# Allegro board multiuart_power1_V1.0.brd
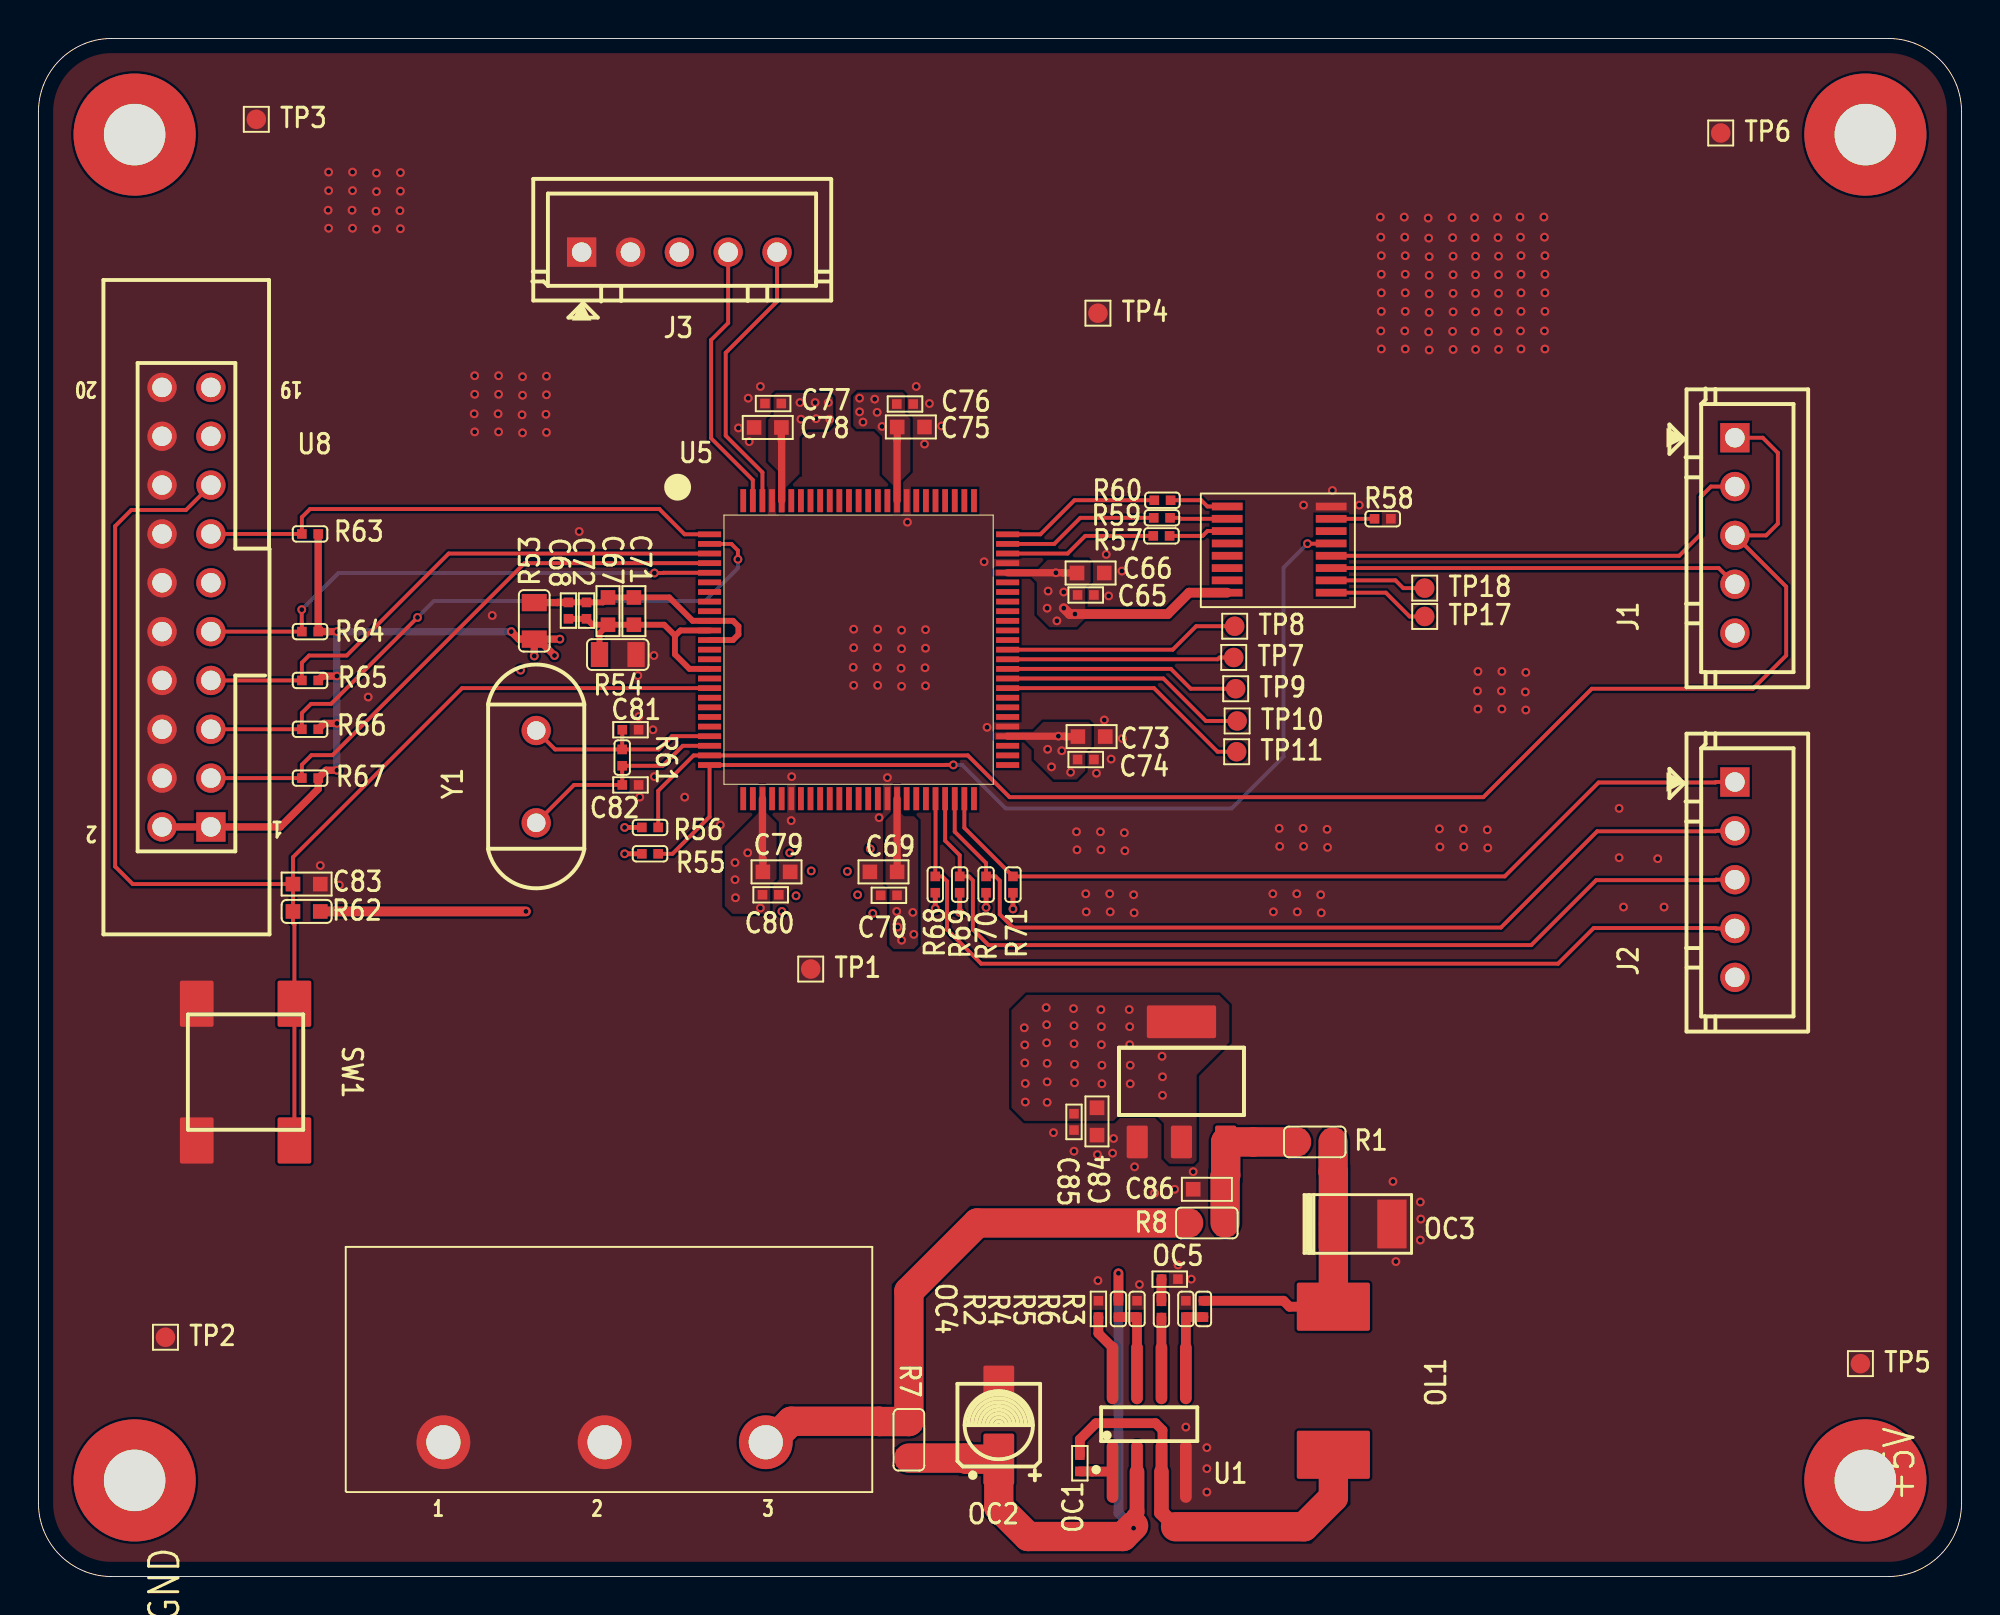
[diagram p0: board, top side]
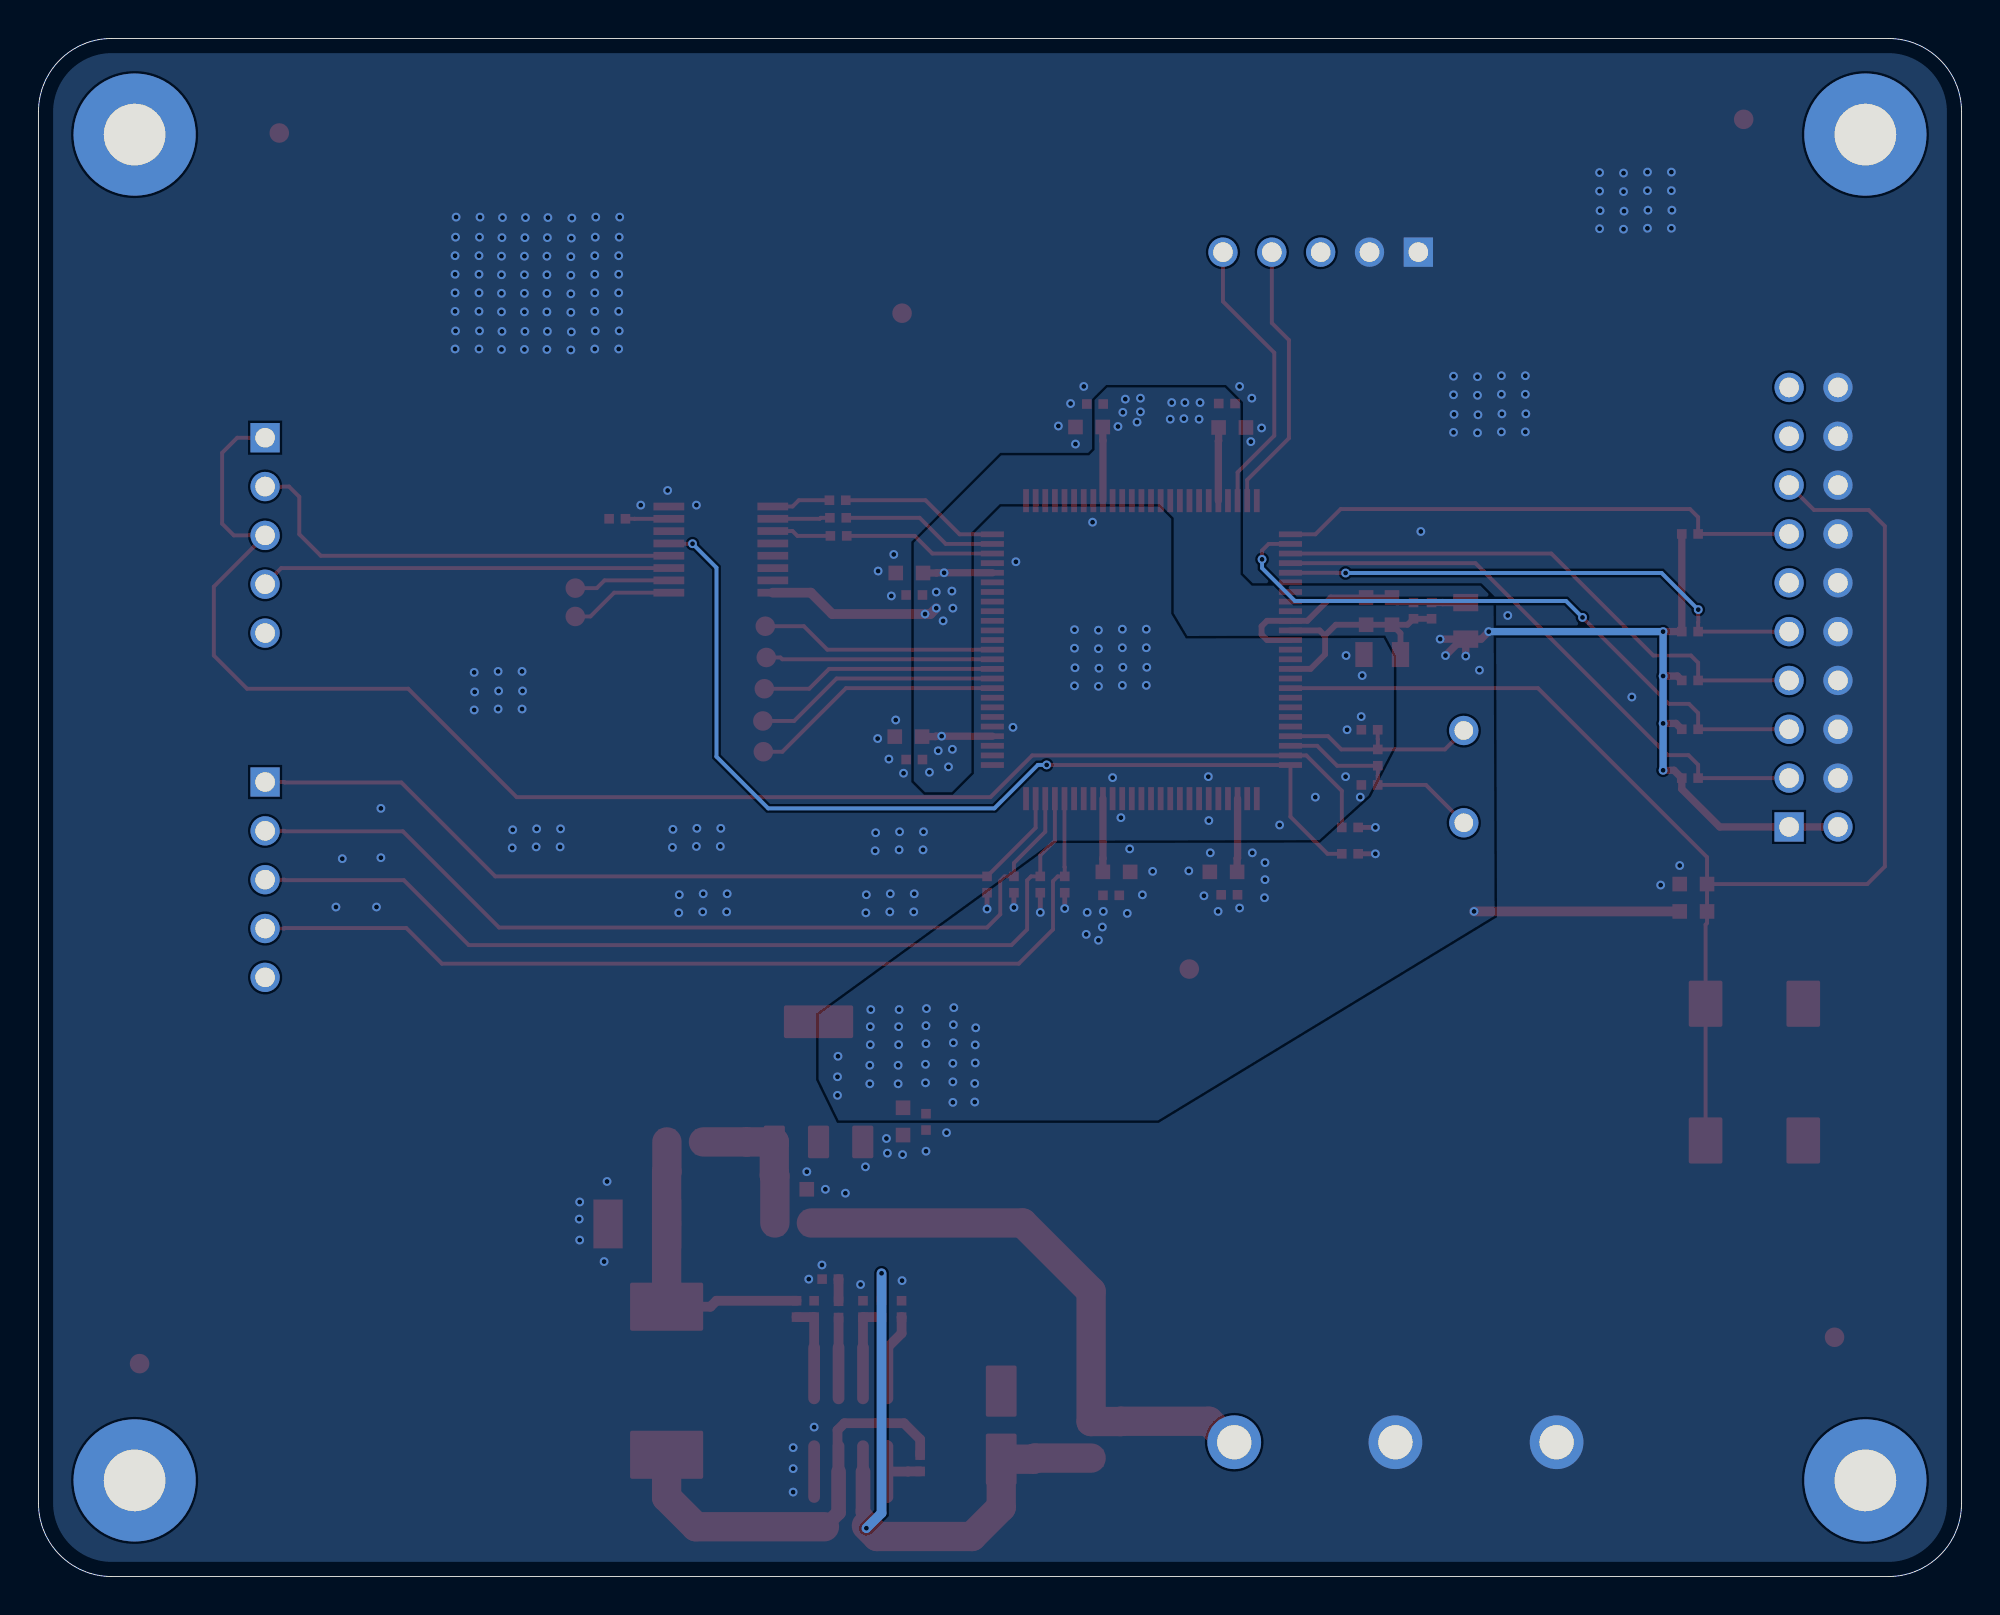
[diagram p1: board, bottom side, seen from below]

Outline 100 x 80 mm; copper layers: TOP, BOTTOM. Coordinates in mm from the lower left corner of the outline.
Outline path: 0,76.19 arc(1.12,78.88) 3.81,80 96.19,80 arc(98.88,78.88) 100,76.19 100,3.81 arc(98.88,1.12) 96.19,0 3.81,0 arc(1.12,1.12) 0,3.81 0,76.19

## Placement (name value [footprint] x y rotation side)
C65  10uF  [C0603]  54.71 52.2 180 top
C66  104  [C0402]  54.46 51.05 0 top
C67  10uF  [C0603]  29.62 50.22 90 top
C68  104  [C0402]  27.56 50.24 270 top
C69  10uF  [C0603]  43.94 36.65 0 top
C70  104  [C0402]  44.22 35.43 180 top
C71  10uF  [C0603]  30.96 50.22 90 top
C72  104  [C0402]  28.5 50.24 270 top
C73  10uF  [C0603]  54.76 43.69 180 top
C74  104  [C0402]  54.46 42.49 0 top
C75  10uF  [C0603]  45.36 59.79 180 top
C76  104  [C0402]  45.06 60.99 0 top
C77  10uF  [C0603]  37.92 59.77 0 top
C78  104  [C0402]  38.2 61.01 180 top
C79  10uF  [C0603]  38.38 36.65 180 top
C80  104  [C0402]  38.07 35.46 0 top
C81  20pF  [C0402]  30.78 44.04 0 top
C82  20pF  [C0402]  30.78 41.17 0 top
C83  102  [C0603]  13.94 36.02 0 top
C84  10uF  [C0603]  55.04 23.67 90 top
C85  104  [C0402]  53.85 23.65 270 top
C86  10uF  [C0603]  60.76 20.14 0 top
J1  -  [CON5]  88.21 49.07 90 top
J2  -  [CON5]  88.21 31.17 90 top
J3  -  [CON5]  38.4 68.88 180 top
NOREF  -  [unnamed]  95 75 0 top
NOREF#2  -  [unnamed]  5 5 0 top
NOREF#3  -  [unnamed]  5 75 0 top
NOREF#4  -  [unnamed]  95 5 0 top
OC1  10nF  [C0402]  54.15 5.89 90 top
OC2  22uF-25V  [CAPAE430X600]  49.94 7.87 90 top
OC3  22uF-16V  [CT1210]  68.86 18.34 0 top
OC4  104  [C0402]  55.12 13.92 90 top
OC5  332  [C0402]  58.83 15.47 0 top
OL1  22uH-DCR<0.1R-2A  [INDP8X8]  67.34 10.19 90 top
R1  0R  [R0805]  66.37 22.61 180 top
R2  1M  [R0402]  56.16 13.92 270 top
R3  47K  [R0402]  60.58 13.92 90 top
R4  1M  [R0402]  57.12 13.92 270 top
R5  2K2  [R0402]  58.39 13.89 270 top
R6  10K  [R0402]  59.66 13.92 270 top
R7  0R  [R0805]  45.26 7.11 270 top
R8  0R/NC  [R0805]  60.76 18.39 0 top
R53  0R  [R0805]  25.78 49.71 90 top
R54  0R  [R0805]  30.12 47.96 180 top
R55  10K  [R0402]  31.8 37.59 0 top
R56  10K  [R0402]  31.8 38.96 0 top
R57  0R  [R0402]  58.39 54.13 180 top
R58  0R  [R0402]  69.9 55.02 180 top
R59  0R  [R0402]  58.42 55.07 180 top
R60  0R  [R0402]  58.45 55.98 180 top
R61  10M  [R0402]  30.35 42.6 270 top
R62  10K  [R0603]  13.94 34.59 180 top
R63  10K  [R0402]  14.12 54.23 0 top
R64  10K  [R0402]  14.12 49.15 0 top
R65  10K  [R0402]  14.12 46.61 0 top
R66  10K  [R0402]  14.12 44.07 0 top
R67  10K  [R0402]  14.12 41.53 0 top
R68  10K  [R0402]  46.63 35.99 90 top
R69  10K  [R0402]  47.9 35.99 90 top
R70  10K  [R0402]  49.28 35.99 90 top
R71  10K  [R0402]  50.67 35.99 90 top
SW1  SW_PUSH2  [SW4_SMD]  10.77 26.24 270 top
TP1  P2.1  [TP_SMD]  40.16 31.6 0 top
TP2  P2.2  [TP_SMD]  6.6 12.45 0 top
TP3  P2.4  [TP_SMD]  11.33 75.79 0 top
TP4  P1.4  [TP_SMD]  55.09 65.71 0 top
TP5  P1.17  [TP_SMD]  94.74 11.07 0 top
TP6  P1.19  [TP_SMD]  87.48 75.08 0 top
TP7  P0.23  [TP_SMD]  62.15 47.8 0 top
TP8  P0.24  [TP_SMD]  62.2 49.43 0 top
TP9  P0.25  [TP_SMD]  62.26 46.18 0 top
TP10  P0.26  [TP_SMD]  62.33 44.5 0 top
TP11  P1.27  [TP_SMD]  62.31 42.9 0 top
TP17  P1.0  [TP_SMD]  72.09 49.94 0 top
TP18  P1.0  [TP_SMD]  72.09 51.41 0 top
U1  MP1482DS  [SO8N]  57.76 7.92 0 top
U5  LPC1768  [LQFP100P0_5B14X14]  42.65 48.21 270 top
U6  SN74CB3Q3251DBQR  [SN74CB3Q3251_DBQ]  64.26 53.87 90 top
U7  AMS1117-3.3V  [SOT223]  59.44 25.76 0 top
U8  CONN20X2_54  [IDC-20]  7.7 50.42 180 top
UP1  CON3  [CON3-P]  29.41 11.33 0 top
Y1  12M  [XDIP2]  25.88 41.61 90 top

## Library data of the parts
C65-C86 OC1 OC4 OC5 = CAPACITOR
J1-J3 = CON5
OC2 = CAPACITOR_POL_0: Tolerance: RichardLC
OC3 = CAPACITOR_POL_0
OL1 = INDUCTOR_1: Tolerance: RichardLC
R1 R7 R8 = R-R0805
R2-R6 R53-R60 R68-R71 = R
R61-R67 = RESISTOR
SW1 = SW_PUSH2
TP1-TP11 TP17 TP18 = T_POINT_R
U1 = PM1066: User Part Number: pn; Tolerance: RichardLC
U5 = LPC1768_0
U6 = SN74CB3Q3251DBQR_5
U7 = AMS1117: User Part Number: pn; Tolerance: RichardLC
U8 = CON 10x2 2.0mm
UP1 = CON3: room: CPU
Y1 = CRY_1

## Footprints (pads in the part's own frame, mm; a bottom-side part is the same pattern mirrored in y, then rotated)
C0402
  rect 0.5x0.5 smd: 1(0.425,0) 2(-0.425,0)
C0603
  rect 0.76x0.76 smd: 1(-0.71,0) 2(0.71,0)
CAPAE430X600
  custom 2.66x1.6 smd: 1(-1.77,0) 2(1.77,0)
CON3-P
  round 2.794 hole 1.778: 1(-8.357,-4.343) 2(0.025,-4.343) 3(8.407,-4.343)
CON5
  rect 1.524x1.524 hole 1.016: 1(10.16,0)
  round 1.524 hole 1.016: 2(7.62,0) 3(5.08,0) 4(2.54,0) 5(0,0)
CT1210
  rect 1.524x2.54 smd: 1(-1.524,0) 2(1.524,0)
IDC-20
  rect 1.524x1.524 hole 1.016: 1(-1.27,11.43)
  round 1.524 hole 1.016: 2(1.27,11.43) 3(-1.27,8.89) 4(1.27,8.89) 5(-1.27,6.35) 6(1.27,6.35) 7(-1.27,3.81) 8(1.27,3.81) 9(-1.27,1.27) 10(1.27,1.27) 11(-1.27,-1.27) 12(1.27,-1.27) 13(-1.27,-3.81) 14(1.27,-3.81) 15(-1.27,-6.35) 16(1.27,-6.35) 17(-1.27,-8.89) 18(1.27,-8.89) 19(-1.27,-11.43) 20(1.27,-11.43)
INDP8X8
  custom 2.5x3.8 smd: 1(-3.85,0) 2(3.85,0)
LQFP100P0_5B14X14
  rect 0.3x1.2 smd: 1(-6,-7.75) 2(-5.5,-7.75) 3(-5,-7.75) 4(-4.5,-7.75) 5(-4,-7.75) 6(-3.5,-7.75) 7(-3,-7.75) 8(-2.5,-7.75) 9(-2,-7.75) 10(-1.5,-7.75) 11(-1,-7.75) 12(-0.5,-7.75) 13(0,-7.75) 14(0.5,-7.75) 15(1,-7.75) 16(1.5,-7.75) 17(2,-7.75) 18(2.5,-7.75) 19(3,-7.75) 20(3.5,-7.75) 21(4,-7.75) 22(4.5,-7.75) 23(5,-7.75) 24(5.5,-7.75) 25(6,-7.75) 51(6,7.75) 52(5.5,7.75) 53(5,7.75) 54(4.5,7.75) 55(4,7.75) 56(3.5,7.75) 57(3,7.75) 58(2.5,7.75) 59(2,7.75) 60(1.5,7.75) 61(1,7.75) 62(0.5,7.75) 63(0,7.75) 64(-0.5,7.75) 65(-1,7.75) 66(-1.5,7.75) 67(-2,7.75) 68(-2.5,7.75) 69(-3,7.75) 70(-3.5,7.75) 71(-4,7.75) 72(-4.5,7.75) 73(-5,7.75) 74(-5.5,7.75) 75(-6,7.75)
  rect 1.2x0.3 smd: 26(7.75,-6) 27(7.75,-5.5) 28(7.75,-5) 29(7.75,-4.5) 30(7.75,-4) 31(7.75,-3.5) 32(7.75,-3) 33(7.75,-2.5) 34(7.75,-2) 35(7.75,-1.5) 36(7.75,-1) 37(7.75,-0.5) 38(7.75,0) 39(7.75,0.5) 40(7.75,1) 41(7.75,1.5) 42(7.75,2) 43(7.75,2.5) 44(7.75,3) 45(7.75,3.5) 46(7.75,4) 47(7.75,4.5) 48(7.75,5) 49(7.75,5.5) 50(7.75,6) 76(-7.75,6) 77(-7.75,5.5) 78(-7.75,5) 79(-7.75,4.5) 80(-7.75,4) 81(-7.75,3.5) 82(-7.75,3) 83(-7.75,2.5) 84(-7.75,2) 85(-7.75,1.5) 86(-7.75,1) 87(-7.75,0.5) 88(-7.75,0) 89(-7.75,-0.5) 90(-7.75,-1) 91(-7.75,-1.5) 92(-7.75,-2) 93(-7.75,-2.5) 94(-7.75,-3) 95(-7.75,-3.5) 96(-7.75,-4) 97(-7.75,-4.5) 98(-7.75,-5) 99(-7.75,-5.5) 100(-7.75,-6)
R0402
  rect 0.5x0.5 smd: 1(0.425,0) 2(-0.425,0)
R0603
  rect 0.76x0.76 smd: 1(-0.71,0) 2(0.71,0)
R0805
  rect 0.9x1.3 smd: 1(-0.95,0) 2(0.95,0)
SN74CB3Q3251_DBQ
  rect 0.401x1.6 smd: 1(-2.7,-2.959) 2(-2.06,-2.959) 3(-1.42,-2.959) 4(-0.78,-2.959) 5(-0.14,-2.959) 6(0.5,-2.959) 7(1.141,-2.959) 8(1.78,-2.959) 9(1.783,2.446) 10(1.143,2.449) 11(0.506,2.446) 12(-0.14,2.446) 13(-0.78,2.449) 14(-1.422,2.449) 15(-2.06,2.449) 16(-2.7,2.449)
SO8N
  oval 0.61x3.251 smd: 1(-1.905,-2.465) 2(-0.635,-2.465) 3(0.635,-2.465) 4(1.905,-2.465) 5(1.905,2.665) 6(0.635,2.665) 7(-0.635,2.665) 8(-1.905,2.665)
SOT223
  custom 1.1x1.7 smd: 1(-2.3,-3.15) 2(0,-3.15) 3(2.3,-3.15)
  custom 3.6x1.7 smd: 4(0,3.1)
SW4_SMD
  custom 2.4x1.75 smd: 1(3.556,2.54) 2(-3.556,2.54) 3(-3.556,-2.54) 4(3.556,-2.54)
TP_SMD
  round 1.016 smd: 1(0,0)
unnamed
  round 6.35 hole 3.2: (0,0)
XDIP2
  round 1.524 hole 0.965: 1(-2.4,0) 2(2.4,0)

## Nets
GND: C65.1 C66.1 C69.1 C70.1 C73.1 C74.1 C75.1 C76.1 C77.1 C78.1 C79.1 C80.1 C81.1 C82.1 C83.2 C84.1 C85.1 C86.1 J3.1 J3.2 OC2.2 OC3.2 OC4.1 OC5.1 R4.2 R6.2 R54.1 R58.2 SW1.3 SW1.4(6) TP1.1(TP) TP2.1(TP) TP3.1(TP) TP4.1(TP) TP5.1(TP) TP6.1(TP) U1.4(GND) U5.31(VSS1) U5.41(VSS2) U5.55(VSS3) U5.72(VSS4) U5.83(VSS5) U5.97(VSS6) U6.8(GND) U7.1(ADJUST) U8.4 U8.6 U8.8 U8.10 U8.12 U8.14 U8.16 U8.18 U8.20 UP1.1 UP1.2
VCC_3V3: C65.2 C66.2 C69.2 C70.2 C73.2 C74.2 C75.2 C76.2 C77.2 C78.2 C79.2 C80.2 C84.2 C85.2 R53.1 R55.2 R56.2 R62.1 R63.1 R64.1 R65.1 R66.1 R67.1 R68.2 R69.2 R70.2 R71.2 U5.28(VDD1) U5.42(VDDREG1) U5.54(VDD2) U5.71(VDD3) U5.84(VDDREG2) U5.96(VDD4) U6.16(VCC) U7.2(OUT) U7.4(NC) U8.1 U8.2
VCC_5V: C86.2 R1.2 R8.2 U7.3(IN)
VCCIN: R7.1 R8.1 UP1.3
VDDA: C67.2 C68.2 C71.2 C72.2 R53.2 U5.10(VDDA) U5.12(VREFP)
#RESET: C83.1 R62.2 SW1.1 SW1.2 U5.17(#RESET) U8.15
#TRST: R67.2 U5.4(#TRST) U8.3
ACIN-12V: OC2.1 R2.2 R7.2 U1.2(IN)
I2C0-SCK: J1.1 J1.3 R56.1 U5.24(P0.28)
I2C0-SDA: R55.1 U5.25(P0.27) U6.5(A)
I2C0-SDA0: J1.2 U6.4(B1)
I2C0-SDA1: J1.4 U6.3(B2)
I2C1-SCK: J2.3 R69.1 U5.47(P0.1)
I2C1-SDA: J2.4 R68.1 U5.46(P0.0)
I2C2-SCK: J2.1 R71.1 U5.49(P0.11)
I2C2-SDA: J2.2 R70.1 U5.48(P0.10)
P0.2: J3.5 U5.98(P0.2)
P0.3: J3.4 U5.99(P0.3)
P0.4: U5.81(P0.4)
P0.5: U5.80(P0.5)
P0.6: U5.79(P0.6)
P0.7: U5.78(P0.7)
P0.8: U5.77(P0.8)
P0.9: U5.76(P0.9)
P0.15: TP7.1(TP) U5.62(P0.15)
P0.16: TP8.1(TP) U5.63(P0.16)
P0.17: TP9.1(TP) U5.61(P0.17)
P0.18: TP10.1(TP) U5.60(P0.18)
P0.19: TP11.1(TP) U5.59(P0.19)
P0.20: U5.58(P0.20)
P0.21: U5.57(P0.21)
P0.22: U5.56(P0.22)
P0.23: U5.9(P0.23)
P0.24: U5.8(P0.24)
P0.25: U5.7(P0.25)
P0.26: U5.6(P0.26)
P0.29: U5.29(P0.29)
P0.30: U5.30(P0.30)
P1.0: U5.95(P1.0)
P1.1: U5.94(P1.1)
P1.4: U5.93(P1.4)
P1.8: U5.92(P1.8)
P1.9: U5.91(P1.9)
P1.10: U5.90(P1.10)
P1.14: U5.89(P1.14)
P1.15: U5.88(P1.15)
P1.16: U5.87(P1.16)
P1.17: U5.86(P1.17)
P1.18: U5.32(P1.18)
P1.19: U5.33(P1.19)
P1.20: U5.34(P1.20)
P1.21: U5.35(P1.21)
P1.22: U5.36(P1.22)
P1.23: U5.37(P1.23)
P1.24: U5.38(P1.24)
P1.25: U5.39(P1.25)
P1.26: U5.40(P1.26)
P1.27: U5.43(P1.27)
P1.28: U5.44(P1.28)
P1.29: U5.45(P1.29)
P1.30: U5.21(P1.30)
P1.31: U5.20(P1.31)
P2.0: R60.1 U5.75(P2.0)
P2.1: R59.1 U5.74(P2.1)
P2.2: R57.1 U5.73(P2.2)
P2.3: U5.70(P2.3)
P2.4: U5.69(P2.4)
P2.5: U5.68(P2.5)
P2.6: U5.67(P2.6)
P2.7: U5.66(P2.7)
P2.8: U5.65(P2.8)
P2.9: U5.64(P2.9)
P2.10: U5.53(P2.10)
P2.11: U5.52(P2.11)
P2.12: U5.51(P2.12)
P2.13: U5.50(P2.13)
P3.25: U5.27(P3.25)
P3.26: U5.26(P3.26)
P4.28: U5.82(P4.28)
P4.29: U5.85(P4.29)
TCK/SWDCLK: R64.2 U5.5(TCK/SWDCLK) U8.9
TDI: R66.2 U5.2(TDI) U8.5
TDO/SWO: R63.2 U5.1(TDO/SWO) U8.13
TMS/SWDIO: R65.2 U5.3(TMS/SWDIO) U8.7
VREFN: C67.1 C68.1 C71.1 C72.1 R54.2 U5.11(VSSA) U5.15(VREFN)
XTAL1: C81.2 R61.2 U5.22(XTAL1) Y1.2
XTAL2: C82.2 R61.1 U5.23(XTAL2) Y1.1
N16722546: R58.1 U6.7(O\E\)
N16722572: R59.2 U6.10(S1)
N16722576: R57.2 U6.11(S0)
N16722580: R60.2 U6.9(S2)
N16725414: TP17.1(TP) U6.1(B4)
N16725434: TP18.1(TP) U6.2(B3)
N16752573: OC3.1 OL1.2 R1.1 R3.1
N16752577: OC1.1 OL1.1 U1.3(SW)
N16752843: OC4.2 U1.8(SS)
N16752877: R2.1 R4.1 U1.7(EN)
N16752929: R3.2 R6.1 U1.5(FB)
N16752937: OC1.2 U1.1(BST)
N167526111: OC5.2 R5.2
N167526413: R5.1 U1.6(COMP)

Pads without a net: J1 5; J2 5; J3 3; U5 13 14 16 18 19 100; U6 6 12 13 14 15; U8 11 17 19

## Via types
v1: diameter 0.457, hole 0.254, TOP to BOTTOM, 311 vias

## Routing (per net, layer and track width the routed paths; a pad name or vN(x,y) marks a point on that pad's centre or on a via; arc(x,y) is an arc through that point)
GND:
  vias: v1(14.66,36.98) v1(15.09,73.05) v1(15.09,72.08) v1(15.06,71.07) v1(15.09,70.13) v1(15.65,35.97) v1(16.33,73.05) v1(16.33,72.08) v1(16.31,71.07) v1(16.33,70.13) v1(17.14,45.75) v1(17.58,73) v1(17.58,72.03) v1(17.55,71.02) v1(17.58,70.08) v1(18.82,73.02) v1(18.82,72.06) v1(18.8,71.04) v1(18.82,70.1) v1(22.68,62.46) v1(22.68,61.49) v1(22.66,60.48) v1(22.68,59.54) v1(23.6,49.99) v1(23.93,62.46) v1(23.93,61.49) v1(23.9,60.48) v1(23.93,59.54) v1(25.15,60.43) v1(25.17,62.41) v1(25.17,61.44) v1(25.17,59.49) v1(26.42,62.43) v1(26.42,61.47) v1(26.39,60.45) v1(26.42,59.51) v1(28.12,54.36) v1(31.17,46.86) v1(31.22,44.73) v1(31.27,40.54) v1(32,47.9) v1(31.95,44.04) v1(32.03,41.61) v1(33.6,40.54) v1(35.46,39.09) v1(36.4,59.74) v1(36.91,61.29) v1(36.96,59.03) v1(37.54,61.9) v1(39.14,39.32) v1(39.17,41.61) v1(42.39,49.27) v1(42.39,48.31) v1(42.37,47.29) v1(42.39,46.35) v1(43.64,49.27) v1(43.64,48.31) v1(43.61,47.29) v1(43.64,46.35) v1(43.71,39.47) v1(44.15,41.55) v1(44.88,49.22) v1(44.88,48.26) v1(44.86,47.24) v1(44.88,46.3) v1(45.19,54.84) v1(45.64,61.9) v1(46.08,58.9) v1(46.13,49.25) v1(46.13,48.28) v1(46.1,47.27) v1(46.13,46.33) v1(46.33,61.01) v1(46.96,59.84) v1(49.17,52.78) v1(49.33,44.17) v1(52.78,23.09) v1(53.85,22.12) v1(53.98,38.74) v1(54,37.8) v1(54.46,35.51) v1(54.49,34.57) v1(55.02,41.78) v1(55.07,21.95) v1(55.09,15.39) v1(55.22,38.74) v1(55.25,37.8) v1(55.42,44.55) v1(55.52,53.16) v1(55.65,51) v1(55.7,35.51) v1(55.73,34.57) v1(55.78,42.52) v1(55.91,22.78) v1(55.85,22.02) v1(56.34,52.3) v1(56.36,43.59) v1(56.47,38.69) v1(56.49,37.75) v1(56.95,35.46) v1(56.97,34.52) v1(57,21.31) v1(57.25,15.19) v1(58.04,19.94) v1(59.08,20.14) v1(59.26,16.21) v1(59.66,7.77) v1(59.94,15.47) v1(60.05,21.06) v1(60.76,6.71) v1(60.76,5.61) v1(60.76,4.39) v1(64.19,35.51) v1(64.21,34.57) v1(64.52,38.92) v1(64.54,37.98) v1(65.43,35.51) v1(65.46,34.57) v1(65.79,55.73) v1(65.76,38.92) v1(65.79,37.98) v1(66.68,35.46) v1(66.7,34.52) v1(67.01,38.87) v1(67.03,37.93) v1(67.28,56.49) v1(68.68,55.73) v1(69.78,70.71) v1(69.8,69.67) v1(69.83,68.7) v1(69.83,67.73) v1(69.83,66.77) v1(69.83,65.8) v1(69.8,64.79) v1(69.83,63.85) v1(70.43,20.55) v1(70.59,16.38) v1(71.02,70.71) v1(71.05,69.67) v1(71.05,64.79) v1(71.07,68.7) v1(71.07,67.73) v1(71.07,66.77) v1(71.07,65.8) v1(71.07,63.85) v1(71.86,19.48) v1(71.88,18.59) v1(71.86,17.5) v1(72.26,70.66) v1(72.29,69.61) v1(72.32,68.65) v1(72.32,67.68) v1(72.32,66.72) v1(72.32,65.75) v1(72.29,64.74) v1(72.32,63.8) v1(72.85,38.89) v1(72.88,37.95) v1(73.51,70.68) v1(73.54,69.64) v1(73.54,64.76) v1(73.56,68.67) v1(73.56,67.71) v1(73.56,66.74) v1(73.56,65.78) v1(73.56,63.82) v1(74.09,38.89) v1(74.12,37.95) v1(74.68,70.68) v1(74.7,69.64) v1(74.73,68.67) v1(74.73,67.71) v1(74.73,66.74) v1(74.73,65.78) v1(74.7,64.76) v1(74.73,63.82) v1(74.83,46.06) v1(74.85,47.08) v1(74.85,45.12) v1(75.34,38.84) v1(75.36,37.9) v1(75.87,70.68) v1(75.9,69.64) v1(75.92,68.67) v1(75.92,67.71) v1(75.92,66.74) v1(75.92,65.78) v1(75.9,64.76) v1(75.92,63.82) v1(76.1,47.08) v1(76.07,46.06) v1(76.1,45.12) v1(77.04,70.71) v1(77.07,69.67) v1(77.09,68.7) v1(77.09,67.73) v1(77.09,66.77) v1(77.09,65.8) v1(77.07,64.79) v1(77.09,63.85) v1(77.34,47.03) v1(77.32,46.01) v1(77.34,45.07) v1(78.28,70.71) v1(78.31,69.67) v1(78.34,68.7) v1(78.34,67.73) v1(78.34,66.77) v1(78.34,65.8) v1(78.31,64.79) v1(78.34,63.85) v1(82.19,39.95) v1(82.19,37.39) v1(82.42,34.82) v1(84.2,37.34) v1(84.53,34.82)
VCC_3V3: length 87.5
  TOP w0.254: R71.2 v1(50.67,34.72) ; R69.2 v1(47.9,34.54) ; R68.2 v1(46.63,34.75) ; R55.2 v1(30.48,37.59) ; R70.2 v1(49.28,34.8) ; R56.2 v1(30.48,38.96)
  TOP w0.381: U5.71 v1(52.91,52.21) 53.29,52.21 53.3,52.2 C65.2 ; v1(15.52,46.84) 14.78,46.84 R65.1 ; v1(15.52,49.15) R64.1 R63.1 ; R53.1 v1(25.78,47.88) ; R53.1 24.98,48.76 v1(24.59,49.15) ; R53.1 25.98,48.76 ; U5.28 37.65,37.37 37.67,37.35 C79.2 ; v1(15.52,44.37) 14.85,44.37 R66.1 ; 25.98,48.76 v1(27.11,48.76) ; 25.98,48.76 v1(26.83,47.9) ; C73.2 53.35,43.69 53.33,43.71 v1(53.04,43.71) U5.54 ; v1(15.52,41.94) 14.95,41.94 R67.1 14.55,40.96 12.57,38.99 U8.1 U8.2 ; U5.42 44.65,37.36 44.65,37.35 C69.2 ; U5.96 38.65,59.05 38.63,59.07 C77.2 ; C75.2 44.65,59.09 44.65,59.09 U5.84
  TOP w0.508: R62.1 v1(25.35,34.59) ; v1(53.31,50.37) 53.62,50.06 v1(53.9,50.06) 58.72,50.06 59.83,51.17 U6.16
  BOTTOM w0.381: v1(15.52,41.94) v1(15.52,44.37) v1(15.52,46.84) v1(15.52,49.15) v1(24.59,49.15)
  vias: v1(25.07,47.14) v1(36.22,37.13) v1(36.22,36.25) v1(36.25,35.31) v1(36.88,37.64) v1(37.54,34.77) v1(38.66,34.59) v1(39.07,37.64) v1(39.4,35.41) v1(39.6,61.06) v1(39.65,60.2) v1(40.18,36.7) v1(40.39,61.06) v1(40.44,60.22) v1(41.07,61.06) v1(41.15,60.2) v1(42.06,36.68) v1(42.6,35.46) v1(42.7,61.29) v1(42.7,60.58) v1(42.88,60.05) v1(43.26,37.85) v1(43.38,34.49) v1(43.48,61.24) v1(43.61,60.55) v1(43.87,59.82) v1(44.63,34.59) v1(44.68,33.78) v1(44.88,33.1) v1(45.47,34.54) v1(45.52,33.4) v1(51.26,28.54) v1(51.29,27.65) v1(51.29,26.71) v1(51.31,25.65) v1(51.31,24.68) v1(52.4,29.59) v1(52.43,28.7) v1(52.43,27.76) v1(52.5,51.26) v1(52.45,50.37) v1(52.48,43.03) v1(52.45,26.7) v1(52.45,25.73) v1(52.45,24.66) v1(52.68,42.11) v1(52.96,49.71) v1(53.21,42.95) v1(53.31,51.21) v1(53.67,41.83) v1(53.82,29.54) v1(53.85,28.65) v1(53.85,27.71) v1(53.88,26.65) v1(53.88,25.68) v1(55.25,29.49) v1(55.27,28.6) v1(55.27,27.66) v1(55.3,26.59) v1(55.3,25.63) v1(56.72,29.49) v1(56.75,28.6) v1(56.75,27.66) v1(56.77,26.59) v1(56.77,25.63) v1(58.43,27.06) v1(58.45,25.99) v1(58.45,25.03)
VCC_5V: length 9.8
  TOP w0.508: C86.2 61.47,18.63 R8.2
  TOP w1.524: R8.2 61.71,20.84 61.74,20.87 U7.3 63.17,22.61 63.18,22.61 R1.2
VCCIN: length 30.7
  TOP w1.524: R8.1 48.82,18.39 45.26,14.83 R7.1 43.72,8.06 43.71,8.08 39.14,8.08 38.05,6.99 UP1.3
VDDA: length 13.4
  TOP w0.305: C68.2 C72.2 29.36,50.67 C67.2 C71.2 32.8,50.93 34.02,49.71 U5.10 36.12,49.71 36.4,49.43 36.4,49 36.11,48.71 U5.12
  TOP w0.381: C68.2 26.99,50.67 26.98,50.66 R53.2
#RESET: length 73.3
  TOP w0.203: C83.1 4.9,36.02 3.99,36.93 3.99,54.64 4.83,55.47 7.67,55.47 U8.15 ; C83.1 R62.2 13.23,33.99 13.31,33.91 SW1.2 SW1.1 ; C83.1 13.23,37.42 22.03,46.21 U5.17
#TRST: length 31
  TOP w0.203: U8.3 R67.2 13.7,42.22 14.2,42.72 15.29,42.72 25.28,52.71 U5.4
ACIN-12V: length 33.5
  TOP w0.508: 56.9,2.51 v1(56.95,2.51) 56.95,2.64 ; R2.2 v1(56.16,15.77) ; 56.95,3.15 56.95,3.28 57.12,3.45
  TOP w0.762: 56.95,2.64 56.95,3.15 57.12,3.33 U1.2
  TOP w1.524: 56.95,2.64 56.39,2.08 51.46,2.08 49.94,3.61 OC2.1 48.25,6.1 48.19,6.16 R7.2
  BOTTOM w0.508: v1(56.95,2.51) 56.16,3.3 v1(56.16,15.77)
I2C0-SCK: length 81.4
  TOP w0.203: J1.1 89.66,59.23 90.45,58.45 90.45,54.76 89.84,54.15 J1.3 90.88,51.49 90.88,47.9 89.15,46.18 80.77,46.18 75.13,40.54 50.5,40.54 48.32,42.71 U5.24 34.07,42.71 32.23,40.87 R56.1
I2C0-SDA: length 50.9
  TOP w0.203: v1(65.99,53.72) 67.21,53.72 U6.5 ; v1(47.57,42.21) 47.12,42.21 47.11,42.21 U5.25 34.9,39.52 32.97,37.59 R55.1
  BOTTOM w0.203: v1(65.99,53.72) 64.74,52.48 64.74,42.65 62.05,39.95 50.29,39.95 48.03,42.21 v1(47.57,42.21)
I2C0-SDA0: length 23.6
  TOP w0.203: J1.2 86.97,56.69 86.44,56.16 86.44,54.21 85.32,53.09 U6.4
I2C0-SDA1: length 21.3
  TOP w0.203: J1.4 87.37,52.45 U6.3
I2C1-SCK: length 49.1
  TOP w0.203: J2.3 87.22,36.25 87.2,36.22 81,36.22 77.62,32.84 49.4,32.84 48.59,33.66 48.59,36.21 48.38,36.42 R69.1 47.9,37.52 47.15,38.27 U5.47
I2C1-SDA: length 49.8
  TOP w0.203: U5.46 46.65,36.91 46.63,36.9 R68.1 47,36.42 47.24,36.17 47.24,33.66 49.02,31.88 79.02,31.88 80.87,33.73 87.2,33.73 87.22,33.71 J2.4
I2C2-SCK: length 44.7
  TOP w0.203: J2.1 87.22,41.33 87.2,41.3 81.13,41.3 76.24,36.42 R71.1 48.15,38.94 U5.49
I2C2-SDA: length 47.9
  TOP w0.203: U5.48 47.65,38.74 49.28,37.11 R70.1 49.77,36.42 49.99,36.2 49.99,34.44 50.67,33.76 76.05,33.76 81.05,38.76 87.2,38.76 87.22,38.79 J2.2
P0.2: length 14.8
  TOP w0.203: J3.5 38.4,66.32 35.74,63.65 35.74,59.34 37.65,57.43 U5.98
P0.3: length 14.2
  TOP w0.203: J3.4 35.86,65.2 34.98,64.31 34.98,59.21 37.15,57.04 U5.99
P0.15: length 11.8
  TOP w0.203: TP7.1 61.42,47.8 61.32,47.71 U5.62
P0.16: length 12.3
  TOP w0.203: U5.63 58.98,48.21 60.2,49.43 TP8.1
P0.17: length 12.3
  TOP w0.203: U5.61 58.89,47.21 59.92,46.18 TP9.1
P0.18: length 12.8
  TOP w0.203: U5.60 58.5,46.71 60.71,44.5 TP10.1
P0.19: length 13.3
  TOP w0.203: TP11.1 61.32,42.9 58.01,46.21 U5.59
P2.0: length 8.4
  TOP w0.203: U5.75 52.1,54.21 53.87,55.98 R60.1
P2.1: length 8.2
  TOP w0.203: U5.74 52.82,53.71 54.18,55.07 R59.1
P2.2: length 8
  TOP w0.203: U5.73 53.51,53.21 54.43,54.13 R57.1
TCK/SWDCLK: length 27.9
  TOP w0.203: U5.5 32.5,52.21 32.49,52.2 v1(32.03,52.2) ; U8.9 R64.2 13.7,49.63 13.69,49.63 v1(13.69,50.29)
  BOTTOM w0.203: v1(32.03,52.2) 15.6,52.2 v1(13.69,50.29)
TDI: length 33.9
  TOP w0.203: v1(36.37,52.91) 36.37,53.37 36.03,53.71 U5.2 ; U8.5 R66.2 13.7,44.91 14.17,45.39 15.21,45.39 v1(19.71,49.89)
  BOTTOM w0.203: v1(19.71,49.89) 20.57,50.74 34.66,50.74 36.37,52.45 v1(36.37,52.91)
TDO/SWO: length 27.5
  TOP w0.203: U5.1 33.6,54.21 32.28,55.52 14.12,55.52 13.7,55.1 R63.2 U8.13
TMS/SWDIO: length 29.2
  TOP w0.203: U5.3 21.33,53.21 16.03,47.9 14.07,47.9 13.7,47.53 R65.2 U8.7
VREFN: length 12.6
  TOP w0.305: C67.1 28.81,49.51 C72.1 C68.1 ; C67.1 29.17,49.06 R54.2 ; C67.1 C71.1 32.54,49.51 33.11,48.93 ; U5.15 33.85,47.21 33.1,47.96 33.1,48.92 33.11,48.93 ; 33.11,48.93 33.38,49.21 U5.11
XTAL1: length 10.7
  TOP w0.203: R61.2 26.87,43.02 Y1.2 ; R61.2 32.25,43.02 32.94,43.71 U5.22 ; R61.2 30.35,43.56 30.36,43.56 C81.2
XTAL2: length 11.3
  TOP w0.203: Y1.1 27.85,41.17 C82.2 30.36,41.65 30.35,41.66 R61.1 32.47,42.17 33.51,43.21 U5.23
N16722546: length 2.3
  TOP w0.203: R58.1 69,55.02 68.99,55.01 U6.7
N16722572: length 3
  TOP w0.203: U6.10 59.37,55.02 59.32,55.07 R59.2
N16722576: length 3.1
  TOP w0.203: R57.2 60.54,54.13 60.79,54.38 U6.11
N16722580: length 3.1
  TOP w0.203: R60.2 60.46,55.98 60.79,55.66 U6.9
N16725414: length 5.4
  TOP w0.203: TP17.1 71.3,49.94 70.06,51.17 U6.1
N16725434: length 5
  TOP w0.203: U6.2 70.56,51.81 70.97,51.41 TP18.1
N16752573: length 15.5
  TOP w0.508: R3.1 64.75,14.34 65.05,14.04 OL1.2
  TOP w1.524: R1.1 67.32,21.07 67.34,21.05 OC3.1 OL1.2
N16752577: length 22
  TOP w0.508: OC1.1 54.15,7.14 54.99,7.98 58.09,7.98 58.45,7.62 58.45,5.51 U1.3
  TOP w0.762: U1.3 58.39,3.33 59.13,2.59
  TOP w1.524: OL1.1 67.34,4.11 65.81,2.59 59.13,2.59
N16752843: length 3.2
  TOP w0.508: U1.8 55.85,11.91 55.12,12.65 55.12,13.49 OC4.2
N16752877: length 3.9
  TOP w0.508: R2.1 R4.1 U1.7
N16752929: length 3.8
  TOP w0.508: U1.5 R6.1 R3.2
N16752937: length 1.7
  TOP w0.508: OC1.2 54.78,5.47 54.79,5.46 U1.1
N167526111: length 1.2
  TOP w0.508: OC5.2 58.39,15.46 R5.2
N167526413: length 2.9
  TOP w0.508: U1.6 R5.1

## Copper pours and planes (outline as drawn; the poured copper is in the pictures)
GND on TOP, BOTTOM: 96.19,79.24 98.35,78.35 99.24,76.19 99.24,3.81 98.35,1.65 96.19,0.76 3.81,0.76 1.65,1.65 0.76,3.81 0.76,76.19 1.65,78.35 3.81,79.24
VCC_3V3 on TOP: 44.48,41.12 44.48,39.75 44.04,39.32 44.04,36.02 44.25,35.81 44.25,32.87 44.48,32.64 45.52,32.64 45.75,32.87 45.75,39.32 45.52,39.55 45.01,39.55 44.83,39.73 44.83,41.1 44.78,41.15 44.5,41.15
VCC_3V3 on TOP: 37.47,41.1 37.47,39.75 35.69,37.97 35.69,34.87 36.09,34.47 37.9,34.47 38.05,34.62 38.05,35.97 38.38,36.3 38.38,39.19 37.82,39.75 37.82,41.1 37.77,41.15 37.52,41.15
VCC_3V3 on TOP: 44.93,61.59 45.06,61.47 45.06,60.5 45.34,60.22 45.34,57.48 44.83,56.97 44.83,55.35 44.78,55.3 44.5,55.3 44.45,55.35 44.45,56.74 43.87,57.33 43.87,59.31 43.48,59.69 42.55,59.69 42.37,59.87 42.37,61.37 42.6,61.59
VCC_3V3 on TOP: 52.48,52.88 54.56,52.88 54.71,52.73 54.71,51.74 54.43,51.46 54.43,49.83 53.98,49.38 52.58,49.38 51.92,50.04 51.92,51.71 51.61,52.02 49.78,52.02 49.71,52.1 49.71,52.32 49.78,52.4 51.99,52.4
VCC_3V3 on TOP: 52.25,44.45 54.61,44.45 54.76,44.3 54.76,43.21 54.43,42.88 54.43,41.91 53.98,41.45 52.81,41.45 51.77,42.49 51.77,43.03 51.28,43.51 49.76,43.51 49.71,43.56 49.71,43.87 49.78,43.94 51.74,43.94
VCC_3V3 on TOP: 58.83,21.46 60.05,21.46 60.22,21.64 60.22,26.09 61.93,27.79 61.93,29.72 61.39,30.25 51.38,30.25 50.6,29.46 50.6,24.38 51.28,23.7 55.91,23.7 56.18,23.98 58.12,23.98 58.52,23.57 58.52,21.77
VCC_3V3 on TOP: 38.35,61.57 38.23,61.44 38.23,60.45 37.95,60.17 37.95,58.01 38.48,57.48 38.48,55.37 38.53,55.32 38.76,55.32 38.84,55.4 38.84,56.62 39.55,57.33 39.57,57.33 39.57,59.26 39.98,59.66 41.05,59.66 41.33,59.94 41.33,61.32 41.07,61.57
VCC_3V3 on BOTTOM: 58.39,23.72 41.78,23.72 24.28,34.37 24.33,50.85 25.02,51.54 36.91,51.54 37.49,52.12 37.49,61.04 38.3,61.85 44.42,61.85 45.09,61.19 45.09,58.6 45.36,58.32 49.94,58.32 54.48,53.77 54.48,41.38 53.9,40.79 52.5,40.79 51.49,41.81 51.49,54.31 50.01,55.78 41.68,55.78 40.97,55.07 40.97,50.11 40.26,48.92 29.97,48.95 29.39,47.85 29.39,43.13 30.73,40.54 33.35,38.18 47.14,38.15 59.44,29.21 59.44,25.86

## Text on the board
Ref Des/Silkscreen Top: GND | +5V
